# Altium PCB CANController.PCBDOC
Units mil, origin at the board's own origin, x right, y up, seen from the top; angles counter-clockwise.
Board outline 6000 x 4000 mil, 2 copper layers (Top Layer, Bottom Layer); 31 components, 28 nets, 104 pads, 0 vias.
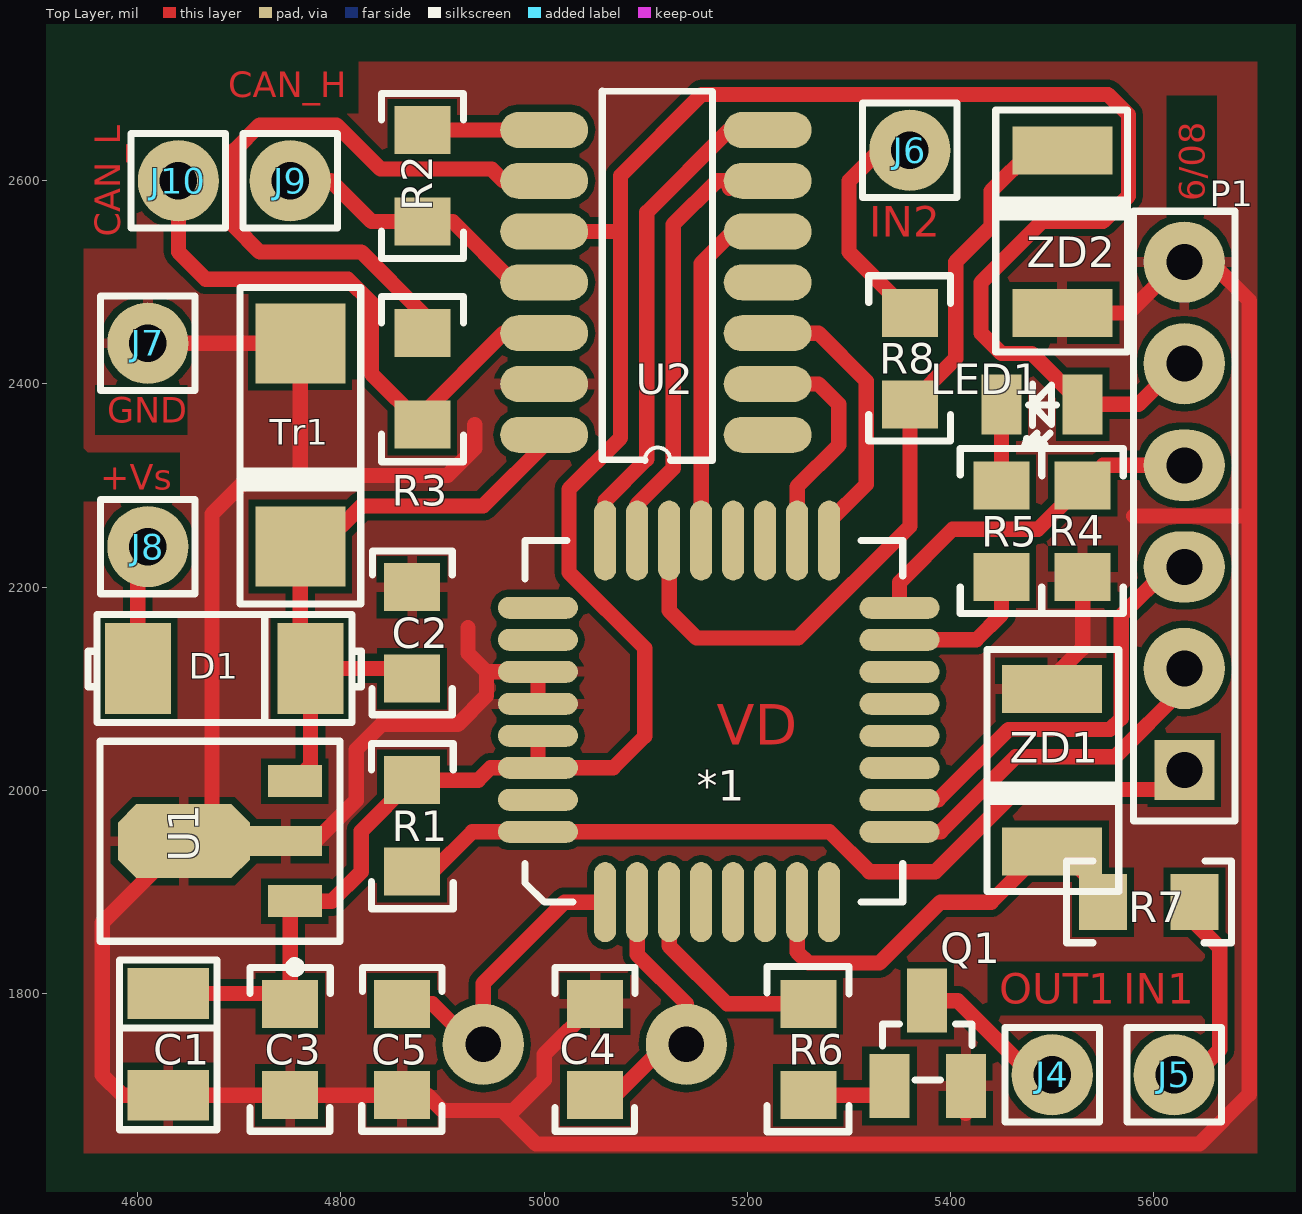
[diagram p0: Top Layer view]
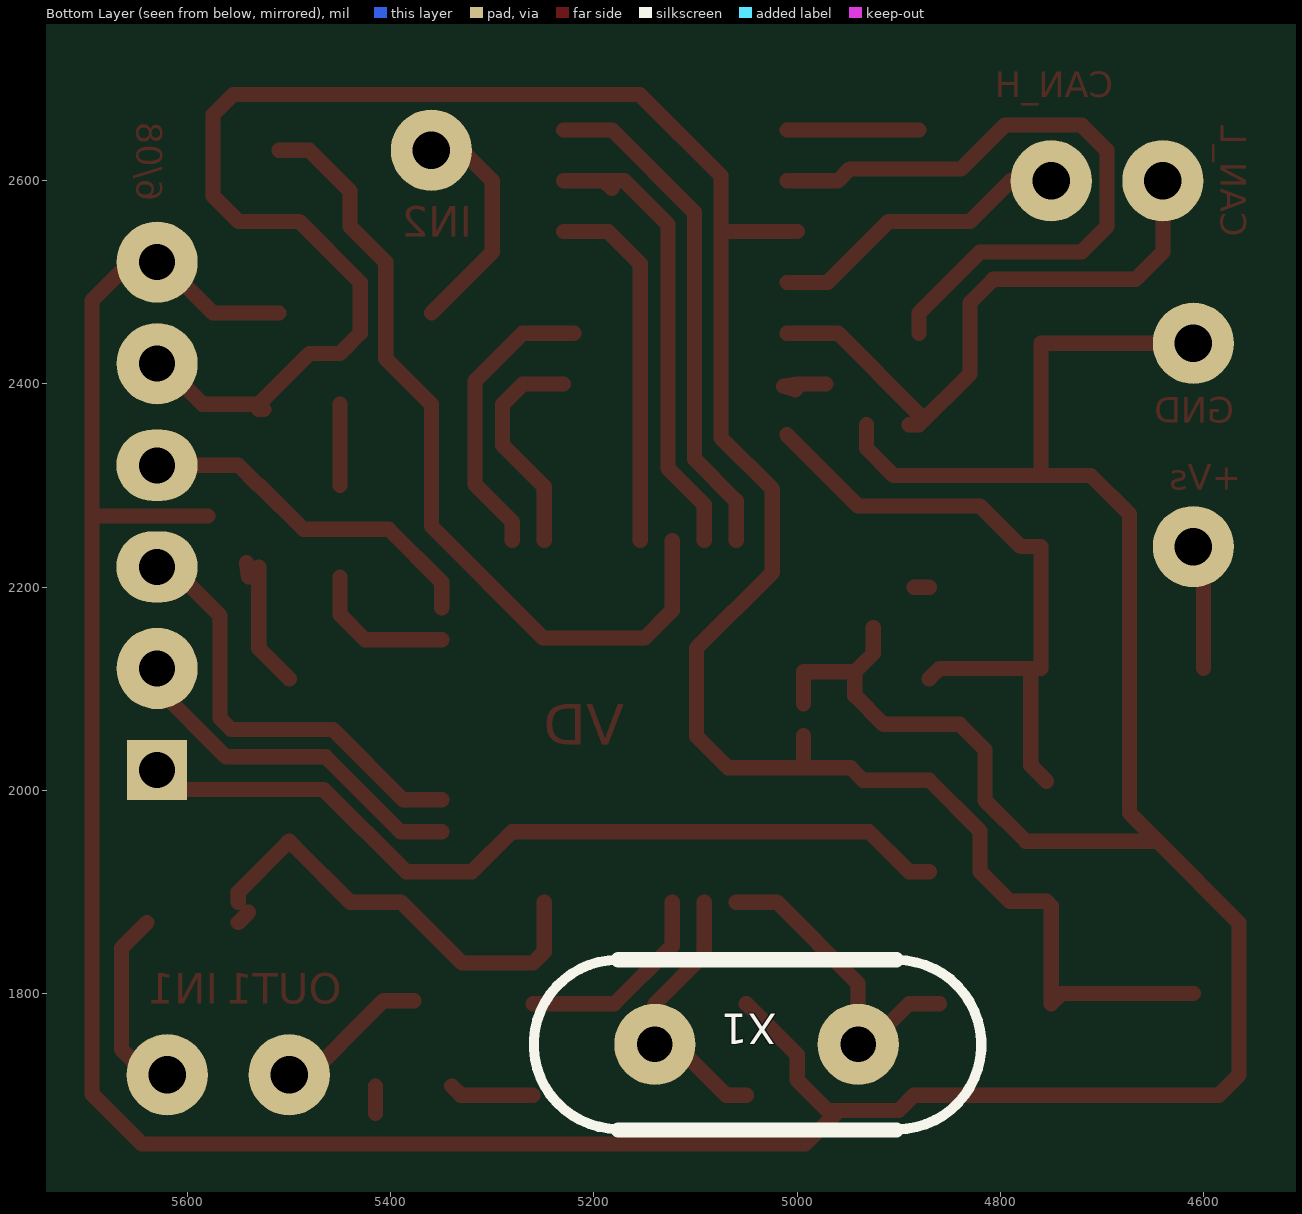
[diagram p1: Bottom Layer view, seen from below]

## Layer stack, top to bottom
Top Layer: signal copper 1.4
Dielectric: dielectric 12.6, FR-4, Dk 4.8
Bottom Layer: signal copper 1.4

## Board outline
1000,1000 7000,1000 7000,5000 1000,5000

## Design rules (kind name [scope] priority, off if disabled: settings)
Clearance [All] p1: gap=7
ComponentClearance [All] p1 off: gap=10 collisioncheckmode=3 verticalgap=10
PolygonConnect [All] p1: connectstyle=Relief reliefconductorwidth=10 reliefentries=4 polygonreliefangle="90 Angle"
RoutingLayers [All] p1: top layer_v5=TRUE bottom layer_v5=FALSE
RoutingVias [All] p1: holewidth=28 width=50 viastyle="Through Hole" minholewidth=28 minwidth=50 maxholewidth=28 maxwidth=50
SolderMaskExpansion [All] p1: expansion=4
TestPointUsage [All] p1: valid=0 allowmultiple=FALSE
Testpoint [All] p1: side=15 testpointundercomponent=TRUE minsize=40 maxsize=100 preferedsize=60 minholesize=0 maxholesize=40 preferedholesize=32 testpointgrid=1 style=1023 order=0123456789
Width [All] p1: maxlimit=30 minlimit=10 preferedwidth=10 toplayer_prefwidth=15 minimp=50.000000 maximp=50.000000 favimp=50.000000
16 further rules are at their usual default settings.

## Components (designator, comment, footprint, x,y, rotation, side; value= is the part's Value field where it differs from the comment)
*1 "ST72F561K" QFP32 5060,1890 r90 top
C1 "C_CT" "CTS A" 4630,1750 r270 top
C2 "C" C0805 4870,2200 r270 top
C3 "C" C0805 4750,1700 r90 top
C4 "C" C0805 5050,1700 r90 top
C5 "C" C0805 4860,1790 r270 top
D1 "D" SMA 4650,2120 r0 top
J4 "OUT1" PIN 5500,1720 r0 top
J5 "IN1" PIN 5620,1720 r0 top
J6 "IN2" PIN 5360,2630 r0 top
J7 "GND" PIN 4610,2440 r0 top
J8 "+Vs" PIN 4610,2240 r0 top
J9 "CAN_H" PIN 4750,2600 r0 top
J10 "CAN_L" PIN 4640,2600 r0 top
LED1 "LED" LED_SMD 5530,2380 r180 top
P1 "Header 6" HDR1X6 5630,2020 r90 top
Q1 "BSS138" SOT23 5340,1710 r0 top
R1 "R" R0805 4870,1920 r90 top
R2 "R" R0805 4880,2560 r90 top
R3 "R" R0805 4880,2360 r90 top
R4 "R" R0805 5530,2300 r270 top
R5 "R" R0805 5450,2300 r270 top
R6 "R" R0805 5260,1790 r270 top
R7 "R" R0805 5640,1890 r180 top
R8 "R" R0805 5360,2470 r270 top
Tr1 "TRANSIL" SMAJ 4760,2440 r270 top
U1 "7805 - 1A" SOT-89 4700,1950 r90 top
U2 "L9669" SO14 5220,2350 r180 top
X1 "16MHz" HC-49U 5140,1750 r180 bottom
ZD1 "BZV55C5.1" SOD80 5500,2020 r90 top
ZD2 "BZV55C5.1" SOD80 5510,2550 r270 top

## Footprints (in the part's own frame and the unit in brackets; to place one, negate y for a bottom-side part, rotate by r counter-clockwise, add the part's x,y. Pads: shape width x height; smd on the part's side, far side on the other; paste and mask are expansions set on the pad)
C0805 [mm]
  rect 1.2x1.4 smd: 1(0,0) 2(2.286,0)
  silkscreen extent -0.9,-1 3.19,1
"CTS A" [mil]
  rect 50x80 smd: 1(-50,0) 2(50,0)
  silkscreen extent -83,-48 84,48
HC-49U [mil]
  round 80 hole 35: 1(0,0) 2(200,0)
  silkscreen extent -119,-84 321,83
HDR1X6 [mil] "Connector; Header; 6 Position"
  rect 59.06x59.06 hole 35.43: 1(0,0)
  round 80 hole 35.43: 2(100,0) 5(400,0) 6(500,0)
  oval 70x80 hole 35.43: 3(200,0) 4(300,0)
  silkscreen extent -50,-50 550,50
LED_SMD [mm]
  rect 1x1.5 smd: 1(0,0) 2(2.032,0)
  silkscreen extent 0.66,-0.51 1.45,1.05
PIN [mil]
  round 80 hole 37: 1(0,0)
  silkscreen extent -46,-46 46,46
QFP32 [mm]
  oval 2x0.55 smd: 1(0,0) 2(0,-0.8) 3(0,-1.6) 4(0,-2.4) 5(0,-3.2) 6(0,-4) 7(0,-4.8) 8(0,-5.6) 17(9.04,-5.6) 18(9.04,-4.8) 19(9.04,-4) 20(9.04,-3.2) 21(9.04,-2.4) 22(9.04,-1.6) 23(9.04,-0.8) 24(9.04,0)
  oval 0.55x2 smd: 9(1.76,-7.36) 10(2.56,-7.36) 11(3.36,-7.36) 12(4.16,-7.36) 13(4.96,-7.36) 14(5.76,-7.36) 15(6.56,-7.36) 16(7.36,-7.36) 25(7.36,1.68) 26(6.56,1.68) 27(5.76,1.68) 28(4.96,1.68) 29(4.16,1.68) 30(3.36,1.68) 31(2.56,1.68) 32(1.76,1.68)
  silkscreen extent 0,-7.44 9.04,2
R0805 [mm]
  rect 1.2x1.4 smd: 1(0,0) 2(2.286,0)
  silkscreen extent -0.93,-1.03 3.2,1.02
SMA [mil]
  rect 65x90 smd: 1(-50,0) 2(120,0)
  silkscreen extent -99,-53 170,53
SMAJ [mm]
  rect 2x2.25 smd: 1(0,0) 2(5.08,0)
  silkscreen extent -1.4,-1.51 6.52,1.51
SO14 [mm]
  oval 2.2x0.9 smd: 1(0,0) 2(0,-1.27) 3(0,-2.54) 4(0,-3.81) 5(0,-5.08) 6(0,-6.35) 7(0,-7.62) 8(5.588,-7.62) 9(5.588,-6.35) 10(5.588,-5.08) 11(5.588,-3.81) 12(5.588,-2.54) 13(5.588,-1.27) 14(5.588,0)
  silkscreen extent 1.38,-8.6 4.13,0.64
SOD80 [mm]
  rect 1.2x2.5 smd: 1(2.032,0) 2(-2.032,0)
  silkscreen extent -3.04,-1.66 3.01,1.63
SOT23 [mm]
  rect 1x1.6 smd: 1(0,-0.025) 2(1.905,-0.025) 3(0.94,2.108)
  silkscreen extent -0.18,0.13 2.06,1.52
SOT-89 [mm]
  oct 1.85x3.3 smd: 0(0,1.388)
  rect 0.8x1.35 smd: 1(1.5,-1.388) 3(-1.5,-1.388)
  rect 0.75x1.8 smd: 2(0,-1.162)
  silkscreen extent -3.27,-2.51 2.5,3.49

## Part data
J4 J5 J6 J7 J8 J9 J10: library part PIN
P1: "Header, 6-Pin"
Q1: "N-Channel Enhancement Mode Vertical DMOS FET"
X1: library part XTALL
ZD1 ZD2: library part ZD

## Nets (pads, with @x,y where several pads share a name; then routed paths per layer and width w, separated by ;. In a path a pad name is that pad's centre, name@x,y a point inside that pad or via, vN(x,y) a via of type N, cw(c..) or ccw(c..) an arc to the next point about the centre after c; other vN are vias at no path point)
+5V: *1.29 *1.30 C1.1 C3.2 LED1.1 P1.5 R1.2 U1.3 U2.10 | length 2504.3
  Top Layer w15: C1.1@4610,1800 C1.1 4740,1800 C3.2 4750,1886.32 U1.3 4790.94,1890.94 4820,1920 4820,1960 R1.2 4935,2010 4947.28,2022.28 *1.30 ; *1.29 *1.30 ; U2.10 5075,2550 ; LED1.1@5525,2375 LED1.1@5530,2375 ; P1.5@5640,2420 P1.5 5625,2420 5585,2380 LED1.1 5480,2430 5450,2430 5430,2450 5430,2500 5490,2560 5550,2560 5575,2585 5575,2665 5555,2685 5155,2685 5075,2605 5075,2550 ; *1.30 5068,2022.28 5099,2053.28 5099,2140 5024.47,2214.53 5024.47,2296.47 5075,2347 5075,2550
GND: *1.27 *1.28 C1.2 C2.1 C3.1 C4.2 C5.2 J7.1 P1.6 Q1.2 R4.2 Tr1.1 U1.0 U1.2 U2.13 ZD1.1 ZD2.1 | length 4433.8
  Top Layer w15: J7.1 Tr1.1 4760,2311 4759,2310 ; C2.1 C2.1@4885,2200 ; 4925,2160 4925,2135 4943.23,2116.77 ; 4931.73,2360 4931.73,2336.73 4905,2310 4759,2310 ; U2.13@4971.73,2400 U2.13 U2.13@5013.41,2397.82 ; *1.28 *1.27 4943.23,2116.77 ; C4.2 5000,1740 5000,1715 4970,1685 4959,1685 ; Q1.2@5415,1682 Q1.2 ; ZD1.1@5500,2110 5530,2140 R4.2 ; ZD2.1 5575,2470 5625,2520 P1.6 5656,2520 5694,2482 5694,1701 5645,1652 4992,1652 4959,1685 ; R4.2@5530,2220 R4.2 ; R4.2@5542,2224 5540,2210 R4.2 ; 5580,2270 5690,2270 ; U1.0 U1.2 4775,1950 4815,1990 4815,2040 4840,2065 4915,2065 4943.23,2093.23 4943.23,2116.77 ; U1.0 4673,1977.63 4673,2272 4711,2310 4759,2310 ; U1.0 4565,1869.63 4565,1720 4585,1700 C1.2 C3.1 C5.2 4885,1700 4900,1685 4959,1685 ; U2.13@5001.81,2394.2 U2.13@5013.41,2397.82 ; U2.13@5001.81,2394.2 U2.13@5013.41,2397.82 ; U2.13@5001.8,2394.21 U2.13@5013.41,2397.82
Net*1_1: *1.1 C5.1 X1.2 | length 323.8
  Top Layer w15: C5.1 4890,1790 4935,1745 4940,1740 X1.2 4940,1810 5020,1890 *1.1
Net*1_2: *1.2 C4.1 X1.1 | length 276.7
  Top Layer w15: C4.1 5070,1700 5110,1740 5140,1740 X1.1 5140,1790 5091.5,1838.5 *1.2
Net*1_3: *1.3 R6.1 | length 203.6
  Top Layer w15: *1.3 5122.99,1847.01 5180,1790 R6.1
Net*1_7: *1.7 R7.2 ZD1.2 | length 449.1
  Top Layer w15: *1.7 5248.98,1841.02 5260,1830 5330,1830 5390,1890 5440,1890 5495,1945 5500,1950 5505,1945 5550,1900 R7.2 ; R7.2@5540,1880 R7.2@5550,1870
Net*1_9: *1.9 P1.2 | length 357.9
  Top Layer w15: *1.9 5390.25,1959.29 5463.96,2033 5562,2033 5630,2101 P1.2
Net*1_10: *1.10 P1.3 | length 434.3
  Top Layer w15: *1.10 5387.79,1990.79 5457,2060 5557,2060 5568,2071 5568,2172 5616,2220 P1.3
Net*1_15: *1.15 R5.2 | length 147.5
  Top Layer w15: *1.15 5425.27,2148.27 5450,2173 R5.2
Net*1_16: *1.16 P1.4 R4.1 | length 353
  Top Layer w15: *1.16 5349.76,2204.76 5402,2257 5486,2257 5529,2300 R4.1 5550,2320 P1.4
Net*1_17: *1.17 U2.3 | length 288.7
  Top Layer w15: U2.3 5270,2450 5317,2403 5317,2301 5280.47,2264.47 *1.17
Net*1_18: *1.18 U2.2 | length 219.4
  Top Layer w15: U2.2@5230,2400 5270,2400 5290,2380 5290,2340 5248.98,2298.98 *1.18
Net*1_21: *1.21 U2.5 | length 361.1
  Top Layer w15: *1.21 5154.49,2518.49 5186,2550 U2.5 U2.5@5230,2550
Net*1_22: *1.22 R8.2 ZD2.2 | length 812.4
  Top Layer w15: *1.22 5122.99,2177.01 5150,2150 5250,2150 5360,2260 R8.2 5405,2425 5405,2520 5440,2555 5440,2590 5480,2630 ZD2.2
Net*1_23: *1.23 U2.6 | length 457.2
  Top Layer w15: *1.23 5091.5,2281.5 5127,2317 5127,2557 5170,2600 U2.6@5190,2600 ; U2.6@5182.5,2592.5 U2.6@5190,2600 ; U2.6@5230,2600 U2.6 U2.6@5190,2600
Net*1_24: *1.24 U2.7 | length 502.6
  Top Layer w15: *1.24 5060,2285 5101,2326 5101,2569 5182,2650 U2.7 U2.7@5230,2650
Net*1_32: *1.32 P1.1 R1.1 | length 834
  Top Layer w15: R1.1 4890,1920 4929.29,1959.29 *1.32 5280.71,1959.29 5320,1920 5385,1920 5466,2001 5611,2001 P1.1
NetD1_1: D1.1 J8.1 | length 130
  Top Layer w15: D1.1 4600,2240 J8.1
NetJ4_1: J4.1 Q1.3 | length 157.4
  Top Layer w15: Q1.3 5407,1793 5490,1710 J4.1@5500,1710
NetJ5_1: J5.1 R7.1 | length 184.9
  Top Layer w15: J5.1@5630,1710 5665,1745 5665,1845 R7.1@5640,1870
NetJ6_1: J6.1 R8.1 | length 227.3
  Top Layer w15: R8.1 5300,2530 5300,2600 5330,2630 J6.1
NetJ9_1: J9.1 R2.1 U2.11 | length 301.4
  Top Layer w15: J9.1 4790,2600 4830,2560 R2.1 4910,2560 4970,2500 U2.11 U2.11@5010,2500
NetJ10_1: J10.1 R3.1 U2.12 | length 624.6
  Top Layer w15: J10.1@4640,2620 J10.1 4640,2530 4667,2503 4807,2503 4830,2480 4830,2410 R3.1 ; R3.1@4890,2360 R3.1 ; U2.12@5010,2450 U2.12 4960,2450 4880,2370 R3.1
NetLED1_2: LED1.2 R5.1 | length 80
  Top Layer w15: R5.1 LED1.2
NetQ1_1: Q1.1 R6.2 | length 83.7
  Top Layer w15: R6.2 5331,1700 Q1.1
NetR2_2: R2.2 U2.8 | length 130
  Top Layer w15: R2.2 U2.8 U2.8@5010,2650
NetR3_2: R3.2 U2.9 | length 663.3
  Top Layer w15: R3.2 4880,2470 4820,2530 4720,2530 4695,2555 4695,2630 4720,2655 4795.62,2655 4838.93,2611.69 4948.31,2611.69 4960,2600 U2.9 U2.9@5010,2600
VS: C2.2 D1.2 Tr1.2 U1.1 U2.14 | length 647
  Top Layer w15: U1.1 4770,2024.43 D1.2 ; C2.2 4860,2120 D1.2 ; U2.14@5010,2350 5005,2345 4940,2280 4820,2280 4780,2240 Tr1.2 4760,2120 D1.2
pads on no net: *1.4 *1.5 *1.6 *1.8 *1.11 *1.12 *1.13 *1.14 *1.19 *1.20 *1.25 *1.26 *1.31 U2.1 U2.4

## Polygon pours and split planes (outlines as drawn)
GND on Top Layer (solid, remove dead copper): 4547,2717 5702,2717 5702,1643 4547,1643

## Other copper
Top Layer:
  text "6/08" at 5650,2580 h25 r90
  text "VD" at 5170,2045 h40

## Dimensions
4530,2740 to 4360,1640 on Top Layer